# EAGLE board Proj23Sch (EAGLE 5.07)
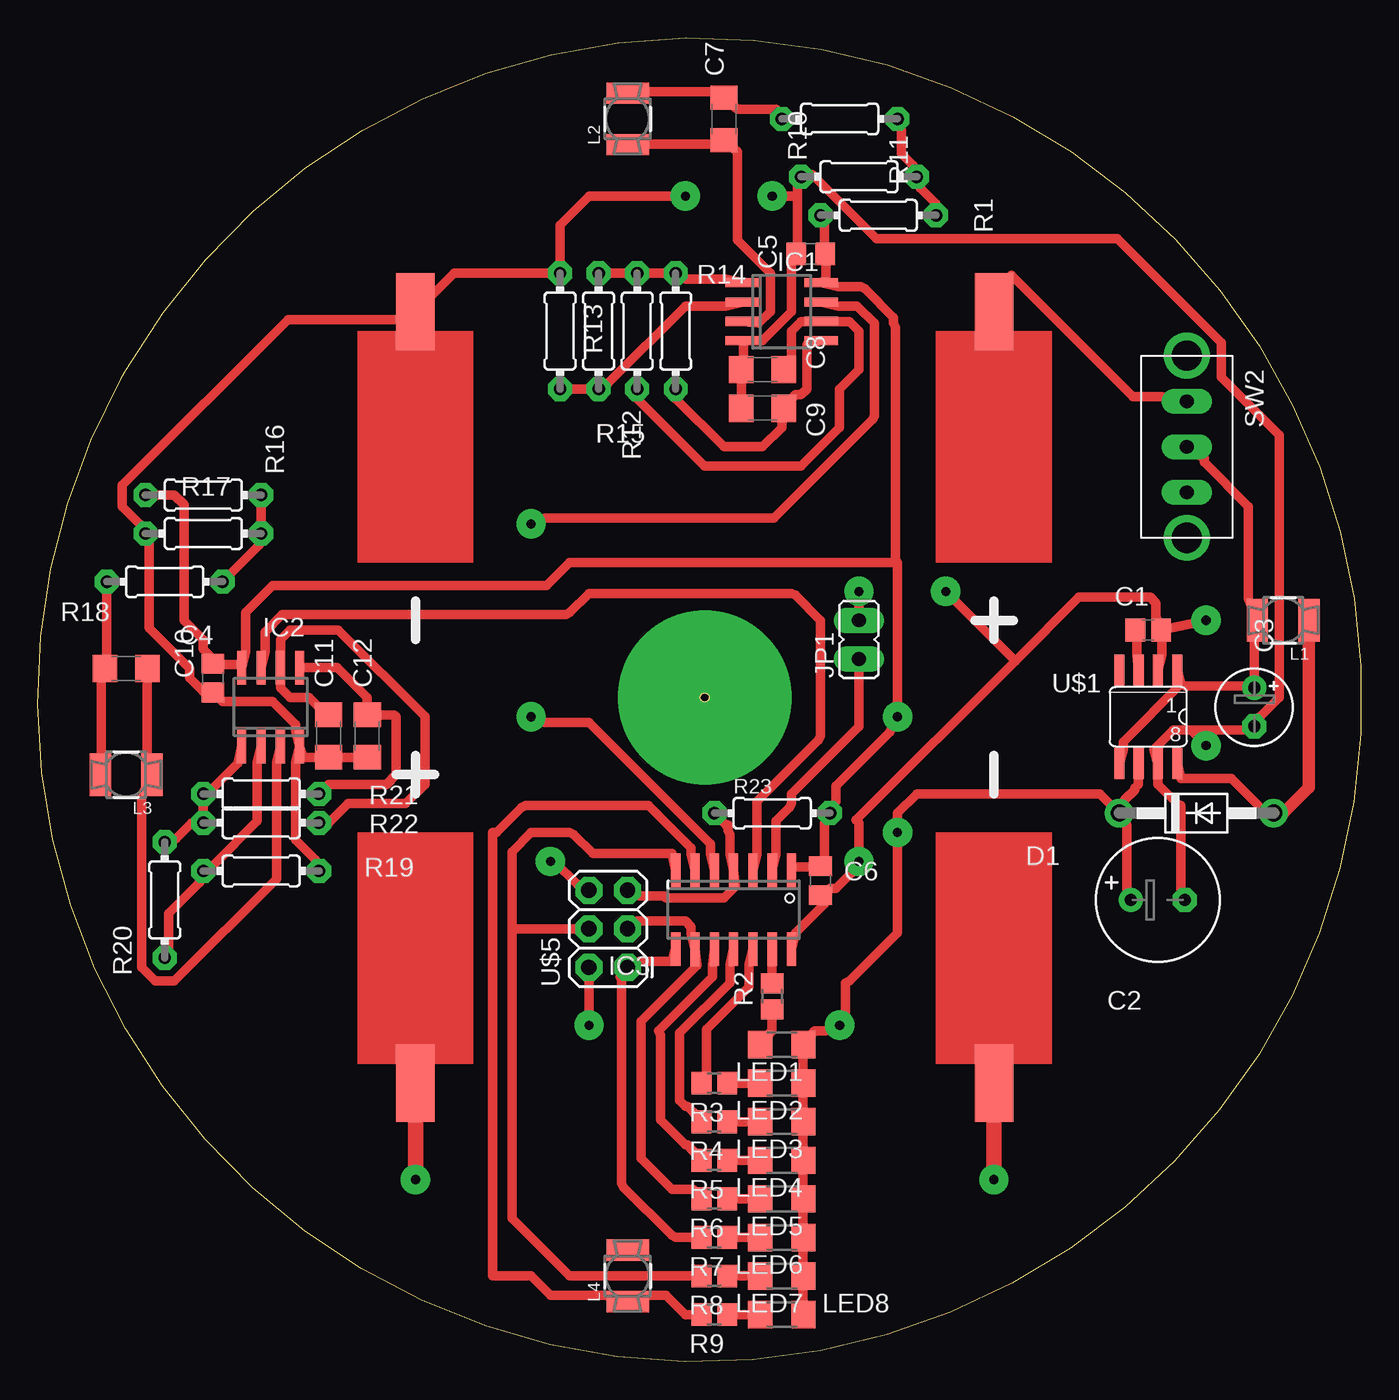
[diagram p0: board, top side]
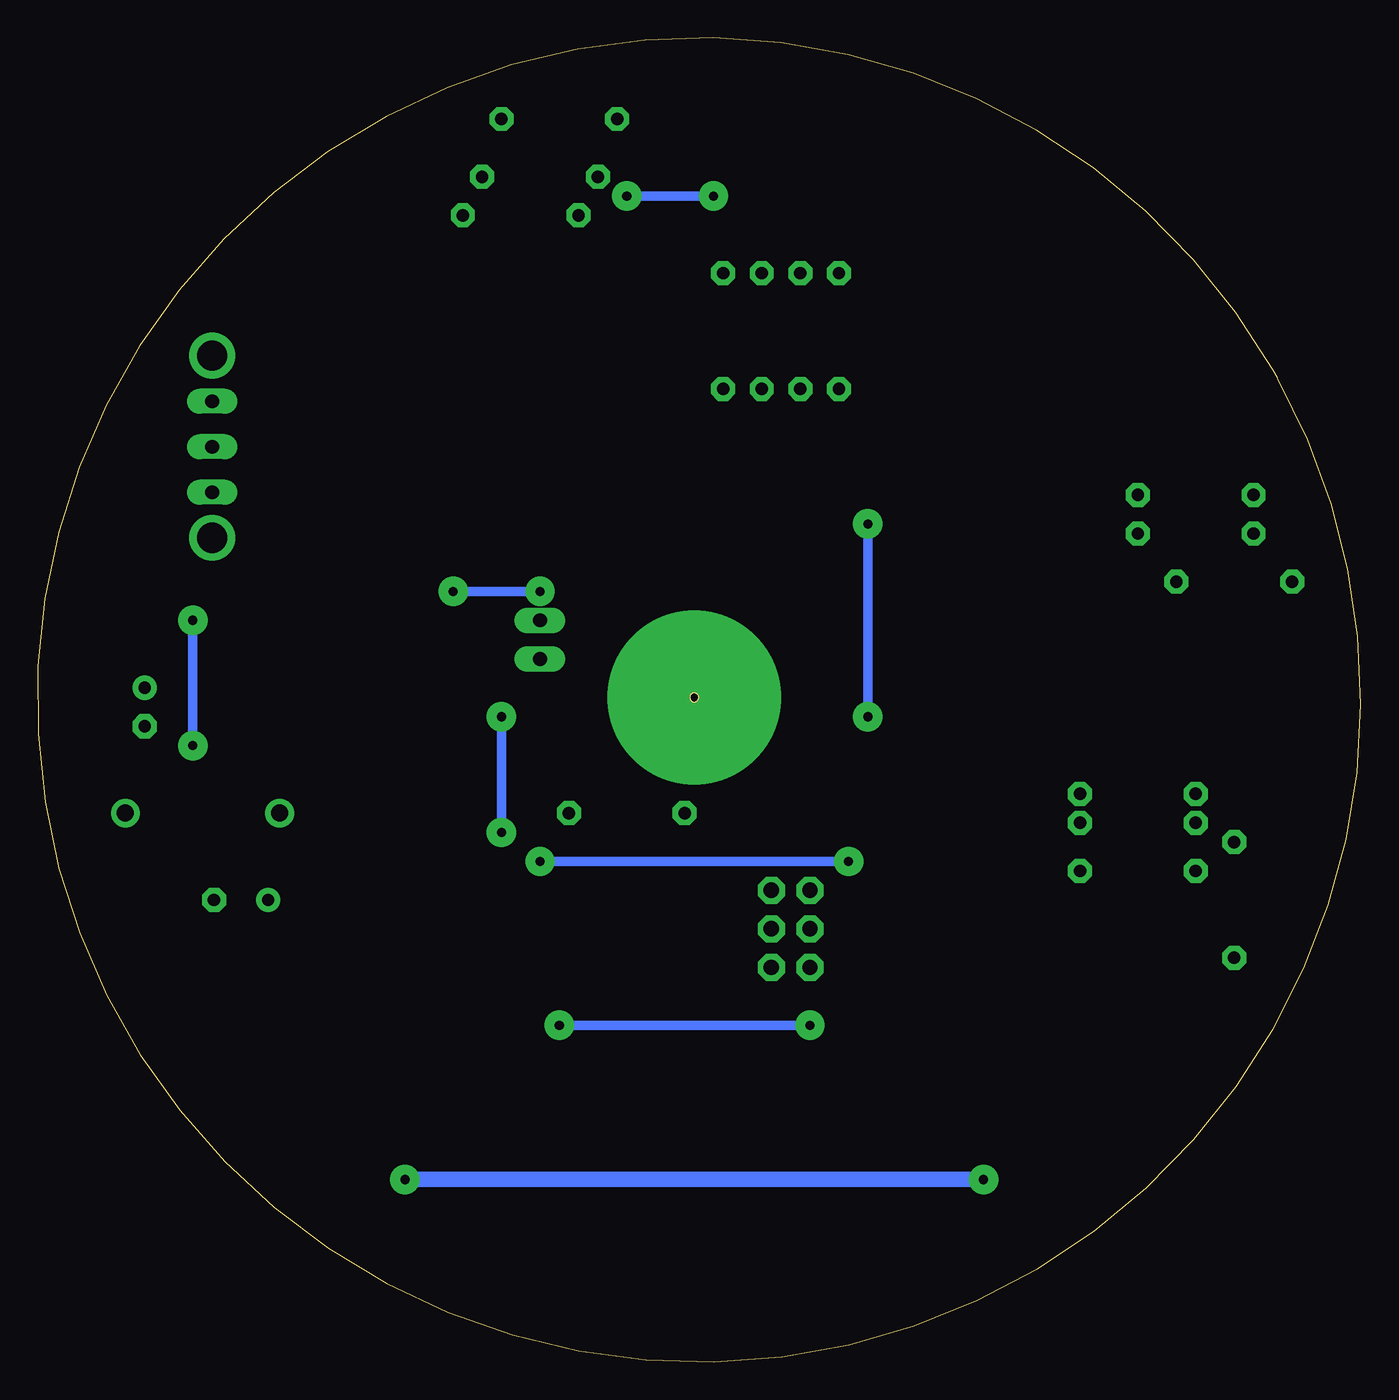
[diagram p1: board, bottom side, seen from below]

Size 87.13 x 87.17 mm. Coordinates in mm from the lower left corner, seen from the top.
Outline: 5.48,64.74 arc359 5.81,65.32 5.48,64.75
Outline: 43.72,43.96 arc-357 43.71,43.95
Copper layers (1*16): Top 0.035mm / dielectric 1.5mm / Bottom 0.035mm
Design rules "default": minimum track width 24mil, minimum drill 24mil, track to track 15mil, track to pad 15mil, pad to pad 15mil, via to via 15mil, smd to smd 15mil, copper to edge 40mil, drill to drill 20mil, minimum pad ring 15mil, minimum via ring 15mil, stop-mask expansion 4mil, vias tented up to drill 0mil, thermal gap 10mil

## Footprints (pad centres in the part's own frame; a part is rotated, then mirrored left to right if it is on the bottom)
AAASMT = smd 5.08 x 2.54: + 53.34,0; - 2.54,0
C0805 = smd 1.3 x 1.5: 1 -0.85,0; 2 0.85,0
E3,5-8 = drill 0.813 pad 1.6 round: + -1.778,0 | drill 0.813 pad 1.6 octagon: - 1.778,0
E2,5-5 = drill 0.813 pad 1.6 round: + -1.27,0 | drill 0.813 pad 1.6 octagon: - 1.27,0
C0805' = smd 1.3 x 1.5: 1 -0.95,0; 2 0.95,0
C1206 = smd 1.6 x 1.8: 1 -1.4,0; 2 1.4,0
DO41-10 = drill 1.118 round: A 5.08,0; C -5.08,0
SO08 = smd 0.6 x 2.2: 1 -1.905,-2.6; 2 -0.635,-2.6; 3 0.635,-2.6; 4 1.905,-2.6; 5 1.905,2.6; 6 0.635,2.6; 7 -0.635,2.6; 8 -1.905,2.6
SOIC14 = smd 0.6 x 2.2: 1 -4.445,-2.6; 2 -3.175,-2.6; 3 -1.905,-2.6; 4 -0.635,-2.6; 5 0.635,-2.6; 6 1.905,-2.6; 7 3.175,-2.6; 8 3.175,2.6; 9 1.905,2.6; 10 0.635,2.6; 11 -0.635,2.6; 12 -1.905,2.6; 13 -3.175,2.6; 14 -4.445,2.6
JP1 = drill 0.914 long: 1 0,-1.27; 2 0,1.27
MS50 = smd 2.8 x 1.4: 1 0,-1.7; 2 0,1.7
1206 = smd 1.6 x 1.803: 1 -1.422,0; 2 1.422,0
0204/7 = drill 0.813 octagon: 1 -3.81,0; 2 3.81,0
R0805 = smd 1.3 x 1.5: 1 -0.85,0; 2 0.85,0
BIGSWITCH = drill 0.9 long: 1 -3,0; 2 0,0; 3 3,0 | drill 2 pad 2.184 round: TAB1 -6,0; TAB2 6,0
SO8 = smd 0.66 x 2.032: 1 -1.27,-3.073; 2 0,-3.073; 3 1.27,-3.073; 4 2.54,-3.073; 5 2.54,3.073; 6 1.27,3.073; 7 0,3.073; 8 -1.27,3.073
2X3 = drill 1.016 octagon: 1 0,0; 2 0,2.54; 3 2.54,0; 4 2.54,2.54; 5 5.08,0; 6 5.08,2.54

## Placement (x,y rotation side)
AAA1  [AAASMT]  24.86,71.67 270 top
AAA2  [AAASMT]  62.96,15.79 90 top
C1  0.1uF  [C0805]  73.12,48.18 0 top
C2  0.1uF  [E3,5-8]  73.75,30.4 0 top
C3  [E2,5-5]  80.1,43.1 270 top
C4  100uF  [C0805']  11.52,45 270 top
C5  0.1uF  [C0805']  50.89,72.94 180 top
C6  0.1uF  [C0805']  51.53,31.67 270 top
C7  0.1uF  [C1206]  45.18,81.83 270 top
C8  1uF  [C1206]  47.72,65.32 0 top
C9  2.2uF  [C1206]  47.72,62.78 0 top
C10  0.1uF  [C1206]  5.81,45.64 0 top
C11  1uF  [C1206]  19.14,41.19 90 top
C12  2.2uF  [C1206]  21.68,41.19 90 top
D1  1N5819  [DO41-10]  76.29,36.11 0 top
IC1  LM358D  [SO08]  48.99,69.13 270 top
IC2  LM358D  [SO08]  15.33,43.1 0 top
IC3  TINY44  [SOIC14]  45.18,29.76 180 top
JP1  [JP1]  54.07,47.54 0 top
L1  22uH  [MS50]  82.01,48.81 90 top
L2  150mH  [MS50]  38.83,81.83 0 top
L3  150mH  [MS50]  5.81,38.65 90 top
L4  150mH  [MS50]  38.83,5.63 0 top
LED1  [1206]  48.99,20.87 180 top
LED2  [1206]  48.99,18.33 180 top
LED3  [1206]  48.99,15.79 180 top
LED4  [1206]  48.99,13.25 180 top
LED5  [1206]  48.99,10.71 180 top
LED6  [1206]  48.99,8.17 180 top
LED7  [1206]  48.99,5.63 180 top
LED8  [1206]  48.99,3.09 180 top
R1  100K  [0204/7]  55.34,75.48 180 top
R2  100  [R0805]  48.35,24.05 90 top
R3  [R0805]  44.54,18.33 180 top
R4  [R0805]  44.54,15.79 180 top
R5  [R0805]  44.54,13.25 180 top
R6  [R0805]  44.54,10.71 180 top
R7  [R0805]  44.54,8.17 180 top
R8  [R0805]  44.54,5.63 180 top
R9  [R0805]  44.54,3.09 180 top
R10  150  [0204/7]  54.07,78.02 0 top
R11  [0204/7]  52.8,81.83 0 top
R12  1M  [0204/7]  36.92,67.86 270 top
R13  4.7K  [0204/7]  34.38,67.86 90 top
R14  100K  [0204/7]  42,67.86 270 top
R15  100K  [0204/7]  39.46,67.86 270 top
R16  100K  [0204/7]  10.89,57.07 180 top
R17  150  [0204/7]  10.89,54.53 0 top
R18  [0204/7]  8.35,51.35 0 top
R19  4.7K  [0204/7]  14.7,32.3 0 top
R20  1M  [0204/7]  8.35,30.4 90 top
R21  100K  [0204/7]  14.7,37.38 0 top
R22  100K  [0204/7]  14.7,35.48 0 top
R23  12K  [0204/7]  48.35,36.11 0 top
SW2  SLIDESWITCHBIG  [BIGSWITCH]  75.66,60.24 270 top
U$1  MAX756  [SO8]  73.75,42.46 180 top
U$5  ISP  [2X3]  38.83,25.95 90 top

## Library data of the parts
AAA1 AAA2 IC3 SW2 = CEDTv18
C1 C7-C12 R2-R9 = quantum-sensor
C2-C6 R1 R10-R23 = rcl
D1 = CEDTv10
IC1 IC2 = linear
JP1 = jumper
L1-L4 = inductor-neosid
LED1-LED8 = ng
U$1 = nnTec.eagle
U$5 = SparkFun

## Nets
DIR: IC2.7 IC3.3
GND: AAA1.- C1.2 C2.- C3.- C4.2 C5.2 C6.2 C8.1 C9.1 C11.1 C12.1 IC1.4 IC2.4 IC3.14 JP1.2 R10.1 R13.2 R17.1 R19.2 U$1.2 U$1.7 U$5.6
INT: IC1.7 IC3.5
MISO: IC3.8 R7.2 U$5.1
MOSI: IC3.7 R8.2 U$5.4
N$1: IC3.13 R2.2
N$3: IC3.2 JP1.1
N$6: IC3.12 R3.2
N$7: IC3.11 R4.2
N$8: IC3.10 R5.2
N$12: IC3.6 R9.2
N$13: C1.1 U$1.3
N$15: AAA1.+ AAA2.-
N$16: AAA2.+ SW2.1
N$18: D1.A L1.1 U$1.8
N$19: C3.+ L1.2 SW2.2 U$1.1 U$1.5
N$20: LED1.2 R2.1
N$21: LED2.2 R3.1
N$22: LED3.2 R4.1
N$23: LED4.2 R5.1
N$24: LED5.2 R6.1
N$25: LED6.2 R7.1
N$26: LED7.2 R8.1
N$27: LED8.2 R9.1
N$28: R1.1 R10.2 R11.2
N$29: C7.1 L2.2 R11.1
N$30: C7.2 IC1.3 L2.1
N$31: IC1.2 R12.2 R13.1
N$32: IC1.1 R12.1 R14.1 R15.1
N$34: C8.2 IC1.6 R15.2
N$35: C9.2 IC1.5 R14.2
N$36: R16.1 R17.2 R18.2
N$38: IC2.1 R20.2 R21.1 R22.1
N$39: IC2.2 R19.1 R20.1
N$40: C12.2 IC2.5 R21.2
N$41: C11.2 IC2.6 R22.2
N$43: C10.2 IC2.3 L3.1
N$44: C10.1 L3.2 R18.1
RST: IC3.4 R23.1 U$5.5
SCK: IC3.9 R6.2 U$5.3
VCC: C2.+ C4.1 C5.1 C6.1 D1.C IC1.8 IC2.8 IC3.1 LED1.1 LED2.1 LED3.1 LED4.1 LED5.1 LED6.1 LED7.1 LED8.1 R1.2 R16.2 R23.2 U$1.6 U$5.2

## Tracks (layer width: path | path; a pad name or v marks a point on that pad's centre or on a via)
DIR
  Top 0.61: IC2.7 14.95,46.78 14.95,48.05 16.09,49.2 34.76,49.2 35.02,49.32 36.29,50.59 49.62,50.59 49.88,50.47 51.53,48.81 51.53,41.19 51.4,40.94 47.34,36.88 47.34,33.45 IC3.3
GND  (via drill 0.6 pad 1.93)
  Top 0.61: 50,76.75 50,73.58 C5.2 49.94,72.63 49.62,72.31 49.62,69.13 47.72,67.23 IC1.4 46.45,66.98 46.45,66.21 C8.1 46.32,64.44 46.32,63.67 C9.1 | 50,76.75 50,77.26 R10.1 51.02,78.15 55.21,73.96 71.09,73.96 77.94,67.1 77.94,64.82 81.75,61.01 81.75,43.73 80.48,42.46 C3.- 79.34,41.58 74.77,41.58 | C1.2 74.01,48.18 74.01,46.53 U$1.2 | 74.77,41.58 73.5,40.31 U$1.7 73.75,38.02 75.15,36.62 75.28,36.62 75.28,31.16 C2.- | v42.64,76.75 36.29,76.75 34.38,74.85 R13.2 27.4,71.67 AAA1.- 23.71,68.63 16.48,68.63 5.55,57.7 5.55,56.31 6.7,55.16 R17.1 7.33,53.77 7.33,48.31 10,45.64 10,45 10.89,44.12 C4.2 12.16,43.48 15.46,43.48 16.98,41.96 16.98,41.58 IC2.4 | v48.35,76.75 50,76.75 | 64.35,46.15 68.55,50.34 73.24,50.34 73.63,49.96 73.63,49.07 73.75,48.81 C1.2 | 64.35,46.15 53.88,35.67 54.07,35.48 v54.07,32.94 53.56,32.18 52.54,31.16 52.16,31.16 C6.2 51.78,30.15 49.88,28.24 IC3.14 | C12.1 20.79,39.8 20.03,39.8 C11.1 18.25,39.8 17.49,39.8 IC2.4 | IC2.4 16.98,39.42 16.98,34.34 18.25,33.07 R19.2 | 74.77,41.58 75.91,41.58 v76.93,40.56 | v76.93,48.81 C1.2 | U$5.6 35.53,31.42 34,32.94 v33.75,32.94 | v54.07,50.72 JP1.2 | 64.35,46.15 v59.78,50.72
  Bottom 0.61: v42.64,76.75 v48.35,76.75 | v54.07,32.94 v33.75,32.94 | v76.93,40.56 v76.93,48.81 | v59.78,50.72 v54.07,50.72
INT  (via drill 0.6 pad 1.93)
  Top 0.61: IC1.7 52.67,69.52 53.94,69.52 55.08,68.37 55.08,62.28 54.96,62.02 48.48,55.55 33.37,55.55 v32.48,55.16 | IC3.5 44.29,33.45 44.29,34.08 36.29,42.08 33.37,42.08 v32.48,42.46
  Bottom 0.61: v32.48,42.46 v32.48,55.16
MISO
  Top 0.61: R7.2 42,8.17 41.75,8.3 38.57,11.48 38.45,11.73 38.45,25.07 38.32,25.32 U$5.1 39.59,26.34 41.75,26.34 IC3.8
MOSI
  Top 0.61: R8.2 35.02,5.63 31.21,9.44 31.21,28.49 | 31.21,28.49 31.21,33.57 32.48,34.84 35.02,34.84 35.27,34.72 36.54,33.45 41.75,33.45 IC3.7 | 31.21,28.49 U$5.4
N$1
  Top 0.61: R2.2 IC3.13
N$2  (via drill 0.6 pad 11.43)
  other vias: 43.91,43.73
N$3
  Top 0.61: JP1.1 54.07,41.83 49.62,37.38 49.62,36.75 49.5,36.5 48.61,35.61 48.61,33.45 IC3.2
N$6
  Top 0.61: R3.2 44.03,18.97 44.03,21.89 46.83,24.68 46.83,26.08 IC3.12
N$7
  Top 0.61: R4.2 43.15,16.43 42.76,16.81 42.64,16.81 42.26,17.19 42.26,21.64 45.56,24.94 45.56,26.08 IC3.11
N$8
  Top 0.61: IC3.10 44.42,26.08 44.42,25.32 40.86,21.76 40.99,21.51 40.99,15.92 42.64,14.27 42.76,14.27 43.15,13.89 R5.2
N$12
  Top 0.61: R9.2 42.64,3.09 41.37,4.36 33.75,4.36 32.48,5.63 29.94,5.63 29.94,34.84 30.19,34.84 31.84,36.5 32.1,36.62 40.22,36.62 43.02,33.83 43.02,33.45 IC3.6
N$13
  Top 0.61: C1.1 72.36,48.18 72.36,46.53 U$1.3
N$15  (via drill 0.6 pad 1.93)
  Top 1.016: v24.86,11.98 AAA1.+ | v62.96,11.98 AAA2.-
  Bottom 1.016: v24.86,11.98 v62.96,11.98
N$16
  Top 0.61: SW2.1 74.01,63.55 72.1,63.55 64.1,71.55 AAA2.+
N$18
  Top 0.61: U$1.8 75.28,38.4 78.58,38.4 80.48,36.5 80.84,36.34 D1.A
  Top 0.813: L1.1 83.71,37.81 82.01,36.11 80.74,36.11 80.84,36.21 80.84,36.34
N$19
  Top 0.61: SW2.2 76.8,59.48 76.8,59.23 79.72,56.31 79.72,50.21 L1.2 80.1,47.42 C3.+ 79.34,44.5 75.53,44.5 75.28,44.62 | 75.28,44.62 71.47,40.81 71.47,40.31 U$1.5 | 75.28,44.62 U$1.1
N$20
  Top 0.61: R2.1 48.35,21.76 LED1.2
N$21
  Top 0.61: R3.1 LED2.2
N$22
  Top 0.61: R4.1 LED3.2
N$23
  Top 0.61: R5.1 LED4.2
N$24
  Top 0.61: R6.1 LED5.2
N$25
  Top 0.61: R7.1 LED6.2
N$26
  Top 0.61: R8.1 LED7.2
N$27
  Top 0.61: R9.1 LED8.2
N$28
  Top 0.61: R1.1 59.15,76.25 58.13,77.26 R10.2 57.62,78.79 56.86,79.55 56.86,81.07 R11.2
N$29
  Top 0.61: R11.1 48.61,82.47 46.07,82.47 C7.1 44.29,83.61 40.22,83.61 L2.2
N$30
  Top 0.61: IC1.3 47.46,68.37 48.23,69.13 48.23,71.67 46.07,73.83 46.07,79.68 C7.2 44.29,80.18 40.22,80.18 L2.1
N$31
  Top 0.61: R13.1 R12.2 37.56,64.44 42.64,69.52 45.3,69.52 IC1.2
N$32
  Top 0.61: R12.1 R15.1 R14.1 42.64,71.29 45.3,71.29 IC1.1
N$34
  Top 0.61: C8.2 49.62,66.21 49.62,67.86 50.26,68.5 IC1.6 53.43,68.5 54.07,67.86 54.07,65.32 52.8,64.05 52.8,61.51 50.26,58.97 43.91,58.97 39.46,63.42 R15.2
N$35
  Top 0.61: IC1.5 50.64,66.98 50.64,64.05 50.26,63.67 49.88,63.67 C9.2 48.99,62.78 48.99,61.51 47.72,60.24 45.18,60.24 42,63.42 R14.2
N$36
  Top 0.61: R18.2 14.57,53.77 R17.2 R16.1
N$38
  Top 0.61: R20.2 9.11,34.46 10.13,35.48 R22.1 R21.1 11.52,37.77 13.17,39.42 IC2.1
N$39
  Top 0.61: IC2.2 14.44,39.42 14.44,35.61 11.52,32.69 R19.1 10.63,31.54 8.6,29.51 8.6,27.35 R20.1
N$40
  Top 0.61: IC2.5 19.72,45.7 21.68,43.73 C12.2 | C12.2 21.68,42.46 | C12.2 23.46,42.59 23.59,42.46 23.59,38.65 22.95,38.02 19.14,38.02 R21.2
N$41
  Top 0.61: 15.97,45.64 15.97,44.37 16.6,43.73 17.87,43.73 19.14,42.46 C11.2 | R22.2 19.14,35.48 20.41,36.75 24.22,36.75 25.49,38.02 25.49,42.46 19.78,48.18 16.6,48.18 15.97,47.54 15.97,45.64 | 15.97,45.64 IC2.6
N$43
  Top 0.61: C10.2 7.2,44.75 7.2,40.05 L3.1 6.82,37.26 6.82,25.95 7.71,25.07 8.98,25.07 15.71,31.8 15.71,39.42 IC2.3
N$44
  Top 0.61: L3.2 4.16,40.05 4.16,44.75 C10.1 4.54,46.53 R18.1
RST
  Top 0.61: U$5.5 39.59,30.65 41.24,30.65 41.37,30.53 45.18,30.53 45.94,31.29 IC3.4 45.56,33.45 45.56,34.72 45.43,34.97 45.43,35.35 45.3,35.35 R23.1
SCK
  Top 0.61: U$5.3 39.46,29 42.64,29 43.02,28.62 43.02,28.24 IC3.9 43.4,26.08 39.72,22.4 39.72,13.38 41.75,11.35 43.15,11.35 R6.2
VCC  (via drill 0.6 pad 1.93)
  Top 0.61: D1.C 71.59,37 72.23,37.64 72.23,37.77 72.48,38.02 U$1.6 | R1.2 51.78,74.72 51.78,73.58 C5.1 51.91,72.31 51.91,71.29 IC1.8 52.67,70.79 54.19,70.79 54.45,70.66 56.35,68.75 56.35,68.37 56.48,68.12 56.48,52.75 | R16.2 8.98,57.07 9.62,56.43 9.62,48.81 10.89,47.54 10.89,46.91 11.52,46.27 C4.1 12.16,45.89 13.17,45.89 IC2.8 13.68,46.78 13.68,49.32 15.46,51.1 33.49,51.1 35.02,52.62 56.23,52.62 56.48,52.75 | D1.C 69.94,37.38 57.88,37.38 56.61,36.11 v56.61,34.84 56.61,28.24 53.43,25.07 53.18,24.94 53.18,23.03 v52.8,22.14 51.91,21.76 51.15,21.76 LED1.1 50.38,19.99 50.38,19.22 LED2.1 50.38,17.45 50.38,16.68 LED3.1 50.38,14.91 50.38,14.14 LED4.1 50.38,12.37 50.38,11.6 LED5.1 50.38,9.83 50.38,9.06 LED6.1 50.38,7.29 50.38,6.52 LED7.1 50.38,4.75 50.38,3.98 LED8.1 | IC3.1 49.88,32.56 50.89,32.56 C6.1 51.78,33.19 51.78,35.48 51.91,35.73 R23.2 52.54,36.88 52.54,37.89 56.1,41.45 v56.61,42.46 56.61,52.62 56.48,52.75 | v36.29,22.14 U$5.2 | C2.+ 71.72,31.16 71.72,35.35 D1.C
  Bottom 0.61: v52.8,22.14 v36.29,22.14 | v56.61,34.84 v56.61,42.46